# Altium PCB Program_Counter.PcbDoc
Units mil, origin at the board's own origin, x right, y up, seen from the top; angles counter-clockwise.
Board outline 5200 x 2700 mil, 2 copper layers (Top Layer, Bottom Layer); 31 components, 53 nets, 225 pads, 176 vias.
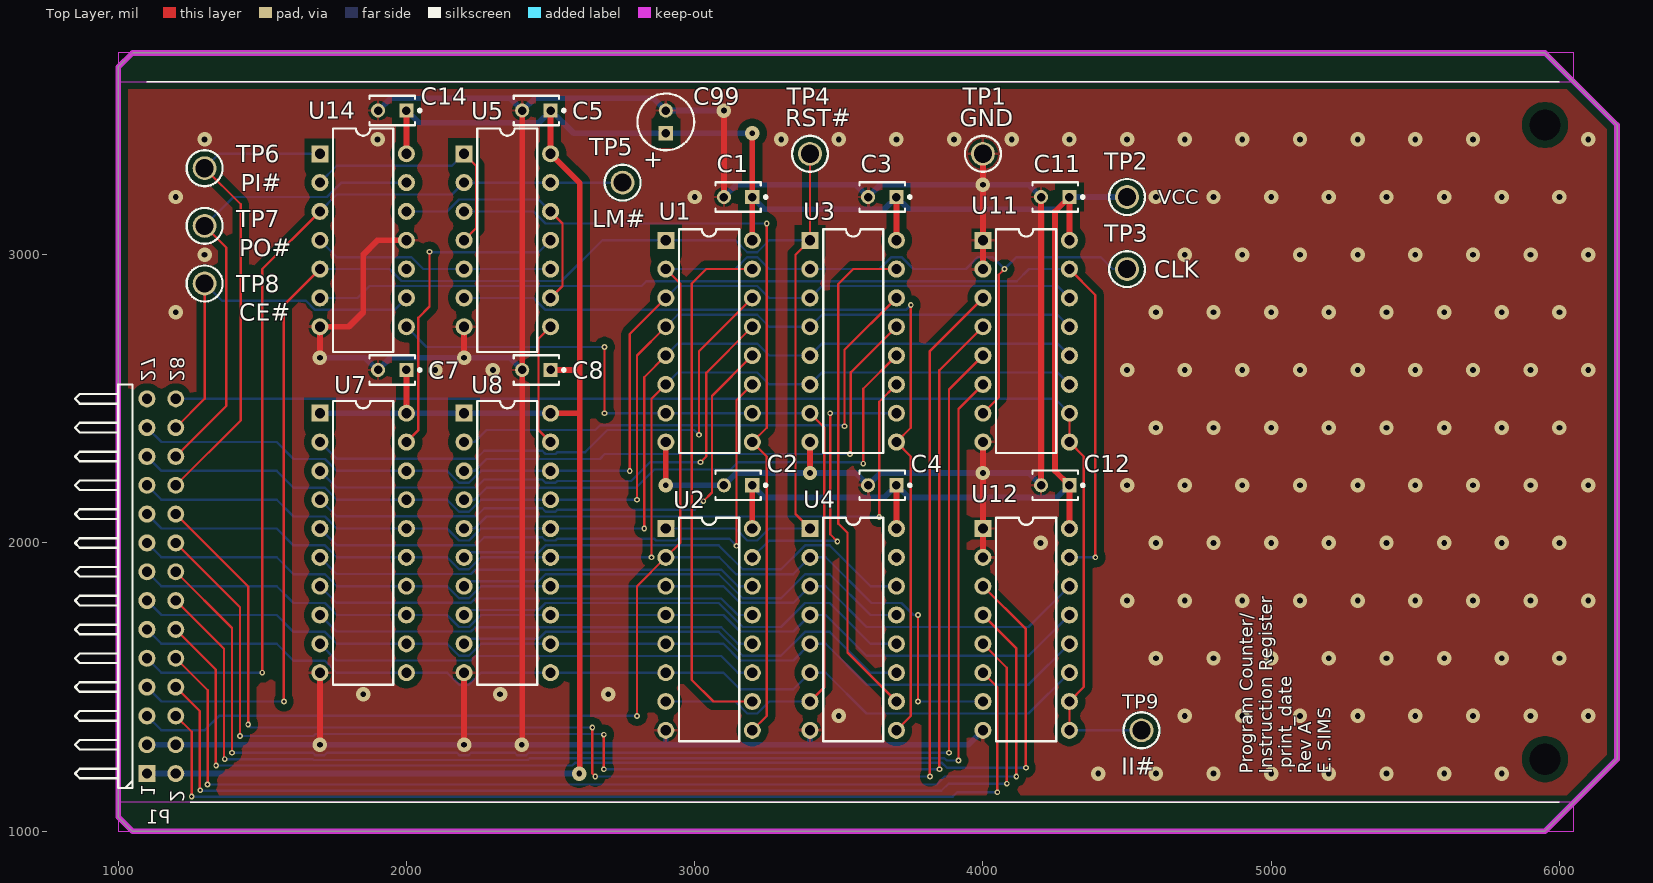
[diagram p0: Top Layer view]
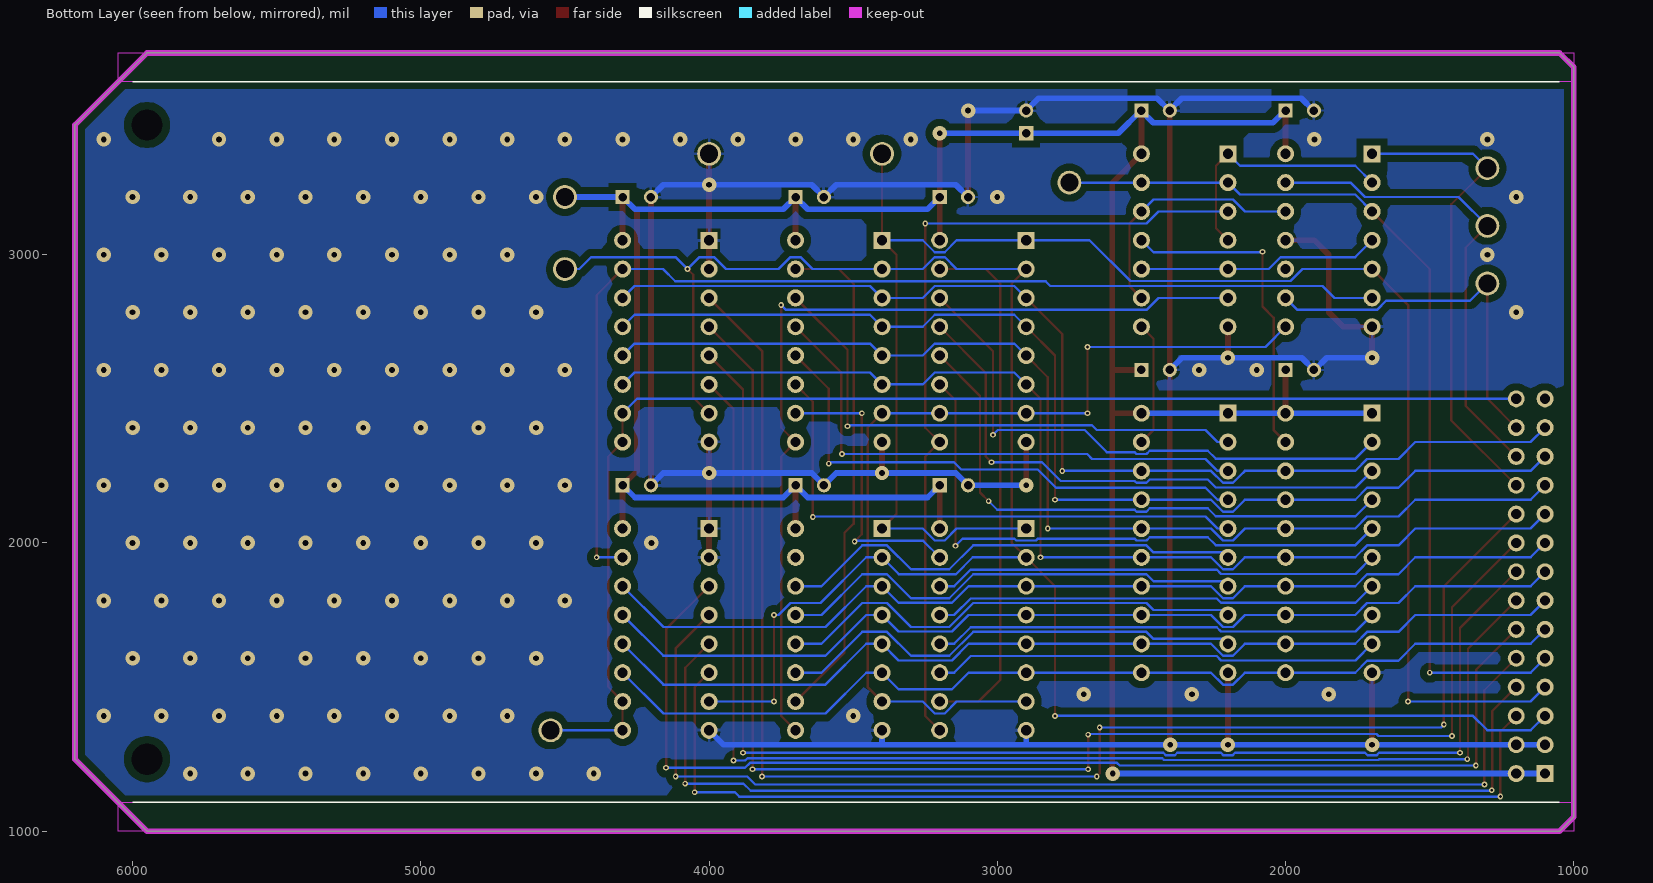
[diagram p1: Bottom Layer view, seen from below]

## Layer stack, top to bottom
Top Solder: solder mask 0.4, Solder Resist, Dk 3.5
Top Layer: signal copper 1.4
Dielectric 1: dielectric 12.6, FR-4, Dk 4.8
Bottom Layer: signal copper 1.4
Bottom Solder: solder mask 0.4, Solder Resist, Dk 3.5

## Board outline
1000,1050 1050,1000 5950,1000 6200,1250 6200,3450 5950,3700 1050,3700 1000,3650

## Design rules (kind name [scope] priority, off if disabled: settings)
BoardOutlineClearance [All] p1: gap=10 ignorepadtopadclearanceinfootprint=FALSE except(0: Arc-SplitContinuation Track-SplitContinuation SMDPad-SplitContinuation THPad-SplitContinuation Via-SplitContinuation Fill-SplitContinuation Poly-SplitContinuation Region-SplitContinuation Text-SplitContinuation)
Clearance Clearance_poly [InPoly] p1: gap=25 ignorepadtopadclearanceinfootprint=FALSE
Clearance [All] p2: gap=8 ignorepadtopadclearanceinfootprint=FALSE
HoleSize [All] p1: absolutevalues=TRUE maxlimit=120 minlimit=1 maxpercent=80.000 minpercent=20.000
PolygonConnect [All] p1: thpad.connectstyle=Relief thpad.reliefconductorwidth=10 thpad.reliefentries=4 thpad.polygonreliefangle="90 Angle" thpad.airgapwidth=10 smdpad.connectstyle=Relief smdpad.reliefconductorwidth=10 smdpad.reliefentries=4 smdpad.polygonreliefangle="90 Angle" smdpad.airgapwidth=10 via.connectstyle=Direct via.reliefconductorwidth=10 via.reliefentries=4 via.polygonreliefangle="90 Angle" via.airgapwidth=10
RoutingTopology [All] p1: topology=Daisy_Simple
RoutingVias "Schematic Routing Via Style_1" [InNetClass('PWR')] p1: holewidth=20 width=35 viastyle="Through Hole" minholewidth=20 minwidth=35 maxholewidth=20 maxwidth=50
RoutingVias [All] p2: holewidth=10 width=20 viastyle="Through Hole" minholewidth=10 minwidth=20 maxholewidth=10 maxwidth=20
SilkToSilkClearance [All] p1: silktosilkclearance=5
SilkToSolderMaskClearance [IsPad] p1: minsilkscreentomaskgap=8 clearancetoexposedcopper=TRUE
SolderMaskExpansion [All] p1: expansion=4 istentingtop=FALSE
UnRoutedNet [All] p1: checkbadconnections=TRUE
Width "Schematic Width Constraint_1" [InNetClass('PWR')] p1: maxlimit=50 minlimit=20 preferedwidth=20
Width [All] p2: maxlimit=8 minlimit=8 preferedwidth=8
25 further rules are at their usual default settings.

## Classes and differential pairs
net class PC[0..15]: PC0 PC1 PC2 PC3 PC4 PC5 PC6 PC7 PC8 PC9 PC10 PC11 PC12 PC13 PC14 PC15
net class INST[0..7]: INST0 INST1 INST2 INST3 INST4 INST5 INST6 INST7
component class PC: C1 C2 C3 C4 C5 C7 C8 U1 U2 U3 U4 U5 U7 U8 U14
component class IR: C11 C12 U11 U12
net class PWR: GND VCC
net class BUS[0..7]: BUS0 BUS1 BUS2 BUS3 BUS4 BUS5 BUS6 BUS7
component class Top: C14 C99 g P1 TP1 TP2 TP3 TP4 TP5 TP6 TP7 TP8 TP9

## Components (designator, comment, footprint, x,y, rotation, side; value= is the part's Value field where it differs from the comment)
C1 "K104K15X7RF5TL2" VISH-K104K15X7RF5TL2 3150.79,3200 r180 top locked
C2 "K104K15X7RF5TL2" VISH-K104K15X7RF5TL2 3150.79,2200 r180 top locked
C3 "K104K15X7RF5TL2" VISH-K104K15X7RF5TL2 3650.79,3200 r180 top locked
C4 "K104K15X7RF5TL2" VISH-K104K15X7RF5TL2 3650.79,2200 r180 top locked
C5 "K104K15X7RF5TL2" VISH-K104K15X7RF5TL2 2450.79,3500 r180 top locked
C7 "K104K15X7RF5TL2" VISH-K104K15X7RF5TL2 1950.79,2600 r180 top locked
C8 "K104K15X7RF5TL2" VISH-K104K15X7RF5TL2 2450.79,2600 r180 top locked
C11 "K104K15X7RF5TL2" VISH-K104K15X7RF5TL2 4250.79,3200 r180 top locked
C12 "K104K15X7RF5TL2" VISH-K104K15X7RF5TL2 4250.79,2200 r180 top locked
C14 "K104K15X7RF5TL2" VISH-K104K15X7RF5TL2 1950.79,3500 r180 top locked
C99 "Cap Pol5" C5x7 2900,3460.63 r90 top locked value=10uF
P1 "Program Counter" HDR2X14H 1100,1200 r90 top locked
TP1 "GND" KSTN-5011_V 4000,3350 r0 top locked
TP2 "VCC" KSTN-5011_V 4500,3200 r0 top locked
TP3 "CLK" KSTN-5011_V 4500,2950 r0 top locked
TP4 "RST#" KSTN-5011_V 3400,3350 r0 top locked
TP5 "LM#" KSTN-5011_V 2750,3250 r0 top locked
TP6 "PI#" KSTN-5011_V 1300,3300 r0 top locked
TP7 "PO#" KSTN-5011_V 1300,3100 r0 top locked
TP8 "CE#" KSTN-5011_V 1300,2900 r0 top locked
TP9 "II#" KSTN-5011_V 4550,1350 r0 top locked
U1 "SN74LS161AN" N016 3050,2700 r270 top locked
U2 "SN74LS161AN" N016 3050,1700 r270 top locked
U3 "SN74LS161AN" N016 3550,2700 r270 top locked
U4 "SN74LS161AN" N016 3550,1700 r270 top locked
U5 "SN74LS00N" N014 2350,3050 r270 top locked
U7 "SN74LS245N" N020 1850,2000 r270 top locked
U8 "SN74LS245N" N020 2350,2000 r270 top locked
U11 "SN74LS173AN" N016D 4150,2700 r270 top locked
U12 "SN74LS173AN" N016D 4150,1700 r270 top locked
U14 "SN74LS04N" N014 1850,3050 r270 top locked

## Footprints (in the part's own frame and the unit in brackets; to place one, negate y for a bottom-side part, rotate by r counter-clockwise, add the part's x,y. Pads: shape width x height; smd on the part's side, far side on the other; paste and mask are expansions set on the pad)
C5x7 [mm] "Capacitor; 2 Leads"
  rect 1.25x1.25 hole 0.75: 1(-1,0)
  round 1.25 hole 0.75: 2(1,0)
  silkscreen extent -2.5,-2.5 2.5,2.5, body extent -2.5,-2.5 2.5,2.5, height 7
HDR2X14H [mm] "Connector; Header; 14x2 Position; Right Angle"
  rect 1.5x1.5 hole 0.9: 1(0,0)
  round 1.5 hole 0.9: 2(0,-2.54) 3(2.54,0) 4(2.54,-2.54) 5(5.08,0) 6(5.08,-2.54) 7(7.62,0) 8(7.62,-2.54) 9(10.16,0) 10(10.16,-2.54) 11(12.7,0) 12(12.7,-2.54) 13(15.24,0) 14(15.24,-2.54) 15(17.78,0) 16(17.78,-2.54) 17(20.32,0) 18(20.32,-2.54) 19(22.86,0) 20(22.86,-2.54) 21(25.4,0) 22(25.4,-2.54) 23(27.94,0) 24(27.94,-2.54) 25(30.48,0) 26(30.48,-2.54) 27(33.02,0) 28(33.02,-2.54)
  silkscreen extent -1.27,1.27 34.29,6.35
KSTN-5011_V [mm] "Test Point, Dia 3.17mm"
  round 2.1 hole 1.6: 1(0,0)
  silkscreen extent -1.59,-1.58 1.59,1.58, body extent -1.59,-1.59 1.59,1.59, height 8.13
N014 [mm] "DIP; 14 Leads; Row Spacing 7.62 mm; Pitch 2.54 mm"
  rect 1.5x1.5 hole 0.9: 1(-7.62,-3.81)
  round 1.5 hole 0.9: 2(-5.08,-3.81) 3(-2.54,-3.81) 4(0,-3.81) 5(2.54,-3.81) 6(5.08,-3.81) 7(7.62,-3.81) 8(7.62,3.81) 9(5.08,3.81) 10(2.54,3.81) 11(0,3.81) 12(-2.54,3.81) 13(-5.08,3.81) 14(-7.62,3.81)
  silkscreen extent -9.85,-2.65 9.85,2.65, body extent -9.15,-5.08 9.15,5.12, height 7.88
N016 [mm] "DIP; 16 Leads; Row Spacing 7.62 mm; Pitch 2.54 mm"
  rect 1.5x1.5 hole 0.9: 1(-8.89,-3.81)
  round 1.5 hole 0.9: 2(-6.35,-3.81) 3(-3.81,-3.81) 4(-1.27,-3.81) 5(1.27,-3.81) 6(3.81,-3.81) 7(6.35,-3.81) 8(8.89,-3.81) 9(8.89,3.81) 10(6.35,3.81) 11(3.81,3.81) 12(1.27,3.81) 13(-1.27,3.81) 14(-3.81,3.81) 15(-6.35,3.81) 16(-8.89,3.81)
  silkscreen extent -9.85,-2.65 9.85,2.65, body extent -10.46,-5.08 10.46,5.12, height 7.88
N016D [mm] "DIP; 16 Leads; Row Spacing 7.62 mm; Pitch 2.54 mm"
  rect 1.5x1.5 hole 0.9: 1(-8.89,-3.81)
  round 1.5 hole 0.9: 2(-6.35,-3.81) 3(-3.81,-3.81) 4(-1.27,-3.81) 5(1.27,-3.81) 6(3.81,-3.81) 7(6.35,-3.81) 8(8.89,-3.81) 9(8.89,3.81) 10(6.35,3.81) 11(3.81,3.81) 12(1.27,3.81) 13(-1.27,3.81) 14(-3.81,3.81) 15(-6.35,3.81) 16(-8.89,3.81)
  silkscreen extent -9.85,-2.65 9.85,2.65, body extent -10.46,-5.08 10.46,5.12, height 7.88
N020 [mm] "DIP; 20 Leads; Row Spacing 7.62 mm; Pitch 2.54 mm"
  rect 1.5x1.5 hole 0.9: 1(-11.43,-3.81)
  round 1.5 hole 0.9: 2(-8.89,-3.81) 3(-6.35,-3.81) 4(-3.81,-3.81) 5(-1.27,-3.81) 6(1.27,-3.81) 7(3.81,-3.81) 8(6.35,-3.81) 9(8.89,-3.81) 10(11.43,-3.81) 11(11.43,3.81) 12(8.89,3.81) 13(6.35,3.81) 14(3.81,3.81) 15(1.27,3.81) 16(-1.27,3.81) 17(-3.81,3.81) 18(-6.35,3.81) 19(-8.89,3.81) 20(-11.43,3.81)
  silkscreen extent -12.5,-2.65 12.5,2.65, body extent -13.08,-5.08 13.08,5.12, height 7.88
VISH-K104K15X7RF5TL2 [mm] "THD, 2-Leads, Body 4x2.6mm"
  rect 1.25x1.25 hole 0.75: 1(-1.25,0)
  round 1.25 hole 0.75: 2(1.25,0)
  silkscreen extent -2.55,-1.3 2,1.3, body extent -2,-1.3 2,1.3, height 5.6

## Part data
C1 C2 C3 C4 C5 C7 C8 C11 C12 C14: library part CMP-2000-06508-1, "Ceramic Capacitor, 100 nF, +/- 10%, 50 V, -55 to 125 degC, 2-Pin THD, RoHS, Tape and Reel", Capacitance=0.1µF, Manufacturer=Vishay, Operating Temperature=-55°C~125°C, Package / Case=Radial, Package Description="2-Pin Through Hole Device, Body 4 x 2.6 mm", Ratings=-, Standard Package=1, Temperature Coefficient=X7R, Tolerance=±10%, Voltage - Rated=50V, Applications=GeneralPurpose, Catalog Drawings=Mono-KapSide2-15_5.58Mono-KapSide1_15, Category=Capacitors, Datasheet URL=http://www.vishay.com/docs/45171/kseries.pdf, Datasheet Version=08/2013, Family=CeramicCapacitors, Features=-, Height - Seated (Max)="0.220\"(5.58mm)", Lead Spacing="0.098\"(2.50mm)", Lead Style=Straight, Manufacturer URL=http://www.vishay.com/, Mounting Technology=ThroughHole, Mounting Type=ThroughHole, Online Catalog=Mono-Kap™Series, Other Names=BC1084CT, Package Reference=K104K15X7RF5TL2, Packaging=CutTape(CT), Series=Mono-Kap™K, Size / Dimension="0.157\"Lx0.098\"W(4.00mmx2.50mm)", Thickness (Max)=-
C99: "Polarized Capacitor", LatestRevisionDate=17-Jul-2002, LatestRevisionNote="Re-released for DXP Platform.", PackageDescription="Polarized Capacitor; 2 Leads", PackageReference=POLAR0.8, Published=8-Jun-2000, Publisher="Altium Limited"
P1: library part "Header 14X2H", "Header, 14-Pin, Dual row, Right Angle", LatestRevisionDate=17-Jul-2002, LatestRevisionNote="Re-released for DXP Platform.", Publisher="Altium Limited", System=Connector
TP1 TP2 TP3 TP4 TP5 TP6 TP7 TP8 TP9: library part TP
U1 U2 U3 U4: "Synchronous 4-Bit Counter", Code_JEDEC=MS-001-BB, ComponentLink1Description="Manufacturer Link", ComponentLink1URL=http://www.ti.com/, ComponentLink2Description=Datasheet, ComponentLink2URL=http://www-s.ti.com/sc/ds/sn74ls161a.pdf, ComponentLink3Description="URL Link1", ComponentLink3URL=http://focus.ti.com/docs/prod/folders/print/sn74ls161a.html, DatasheetVersion=Mar-1988, LatestRevisionDate=04-Mar-2005, LatestRevisionNote="Stylized 3D Model Added.", PackageDescription="DIP; 16 Leads; Row Spacing 7.62 mm; Pitch 2.54 mm", PackageReference=N016, PackageVersion=Oct-1995, Published=8-Jun-2000, Publisher="Altium Limited"
U5: "Quadruple 2-Input Positive-NAND Gate", ComponentLink1Description="Manufacturer Link", ComponentLink1URL=http://www.ti.com/, ComponentLink2Description=Datasheet, ComponentLink2URL=http://www-s.ti.com/sc/ds/sn74ls00.pdf, DatasheetVersion=Mar-1988, LatestRevisionDate=04-Mar-2005, LatestRevisionNote="Stylized 3D Model Added.", PackageDescription="DIP; 14 Leads; Row Spacing 7.62 mm; Pitch 2.54 mm", PackageReference=N014, PackageVersion=Oct-1995, Published=8-Jun-2000, Publisher="Altium Limited"
U7 U8: "Octal Bus Transceiver with 3-State Outputs", ComponentLink1Description="Manufacturer Link", ComponentLink1URL=http://www.ti.com/, ComponentLink2Description=Datasheet, ComponentLink2URL=http://www-s.ti.com/sc/ds/sn74ls245.pdf, DatasheetVersion=Mar-1988, LatestRevisionDate=04-Mar-2005, LatestRevisionNote="Stylized 3D Model Added.", PackageDescription="DIP; 20 Leads; Row Spacing 7.62 mm; Pitch 2.54 mm", PackageReference=N020, PackageVersion=Oct-1995, Published=8-Jun-2000, Publisher="Altium Limited"
U11 U12: "4-Bit D-Type Register with 3-State Outputs", Code_JEDEC=MS-001-BB, ComponentLink1Description="Manufacturer Link", ComponentLink1URL=http://www.ti.com/, ComponentLink2Description=Datasheet, ComponentLink2URL=http://www-s.ti.com/sc/ds/sn74ls173a.pdf, DatasheetVersion=Mar-1988, LatestRevisionDate=04-Mar-2005, LatestRevisionNote="Stylized 3D Model Added.", PackageDescription="DIP; 16 Leads; Row Spacing 7.62 mm; Pitch 2.54 mm", PackageReference=N016D, PackageVersion=Oct-1995, Published=8-Jun-2000, Publisher="Altium Limited"
U14: "Hex Inverter", ComponentLink1Description="Manufacturer Link", ComponentLink1URL=http://www.ti.com/, ComponentLink2Description=Datasheet, ComponentLink2URL=http://www-s.ti.com/sc/ds/sn74ls04.pdf, DatasheetVersion=Mar-1988, LatestRevisionDate=04-Mar-2005, LatestRevisionNote="Stylized 3D Model Added.", PackageDescription="DIP; 14 Leads; Row Spacing 7.62 mm; Pitch 2.54 mm", PackageReference=N014, PackageVersion=Oct-1995, Published=8-Jun-2000, Publisher="Altium Limited"

## Free pads (board coordinates)
  round 0 hole 109: ""(5950,1250) ""(5950,3450)

## Via types
v1: diameter 50, hole 20, Top Layer to Bottom Layer, tented both sides, 130 vias
v2: diameter 20, hole 10, Top Layer to Bottom Layer, tented both sides, 46 vias

## Nets (pads, with @x,y where several pads share a name; then routed paths per layer and width w, separated by ;. In a path a pad name is that pad's centre, name@x,y a point inside that pad or via, vN(x,y) a via of type N, cw(c..) or ccw(c..) an arc to the next point about the centre after c; other vN are vias at no path point)
BUS0: P1.25 U1.3 U3.3 U7.18 U8.18 U11.14 | length 3892.1
  Top Layer w8: v2(2775,2250) 2775,2725 U1.3
  Bottom Layer w8: P1.25 1150,2350 1550,2350 1608.47,2291.53 1717.2,2291.53 1758.73,2250 U7.18 2141.27,2250 2158.47,2232.8 2182.8,2208.47 2217.2,2208.47 2258.73,2250 U8.18 v2(2775,2250) ; U1.3 2941.53,2891.53 3182.8,2891.53 3217.2,2891.53 3258.73,2850 U3.3 3441.53,2891.53 3682.8,2891.53 4258.47,2891.53 U11.14
BUS1: P1.23 U1.4 U3.4 U7.17 U8.17 U11.13 | length 3906.8
  Top Layer w8: v2(2800,2150) 2800,2650 U1.4
  Bottom Layer w8: P1.23 1150,2250 1550,2250 1608.47,2191.53 1717.2,2191.53 1758.73,2150 U7.17 2141.27,2150 2158.47,2132.8 2182.8,2108.47 2217.2,2108.47 2258.73,2150 U8.17 v2(2800,2150) ; U1.4 2941.53,2791.53 3182.8,2791.53 3217.2,2791.53 3258.73,2750 U3.4 3441.53,2791.53 3682.8,2791.53 4258.47,2791.53 U11.13
BUS2: P1.21 U1.5 U3.5 U7.16 U8.16 U11.12 | length 3921.4
  Top Layer w8: v2(2825,2050) 2825,2575 U1.5
  Bottom Layer w8: P1.21 1150,2150 1550,2150 1608.47,2091.53 1717.2,2091.53 1758.73,2050 U7.16 2141.27,2050 2158.47,2032.8 2182.8,2008.47 2217.2,2008.47 2258.73,2050 U8.16 v2(2825,2050) ; U1.5 2941.53,2691.53 3182.8,2691.53 3217.2,2691.53 3258.73,2650 U3.5 3441.53,2691.53 3682.8,2691.53 4258.47,2691.53 U11.12
BUS3: P1.19 U1.6 U3.6 U7.15 U8.15 U11.11 | length 3936.1
  Top Layer w8: v2(2850,1950) 2850,2500 U1.6
  Bottom Layer w8: P1.19 1150,2050 1550,2050 1608.47,1991.53 1717.2,1991.53 1758.73,1950 U7.15 2141.27,1950 2158.47,1932.8 2182.8,1908.47 2217.2,1908.47 2258.73,1950 U8.15 v2(2850,1950) ; U1.6 2941.53,2591.53 3182.8,2591.53 3217.2,2591.53 3258.73,2550 U3.6 3441.53,2591.53 3682.8,2591.53 4258.47,2591.53 U11.11
BUS4: P1.17 U2.3 U4.3 U7.14 U8.14 U12.14 | length 3461.4
  Bottom Layer w8: P1.17 1150,1950 1550,1950 1608.47,1891.53 1717.2,1891.53 1758.73,1850 U7.14 2141.27,1850 2182.8,1808.47 2217.2,1808.47 2258.73,1850 U8.14 U2.3 3100,1850 3157.53,1792.47 3342.47,1792.47 U4.3 3455,1850 3596.53,1708.47 4158.47,1708.47 U12.14
BUS5: P1.15 U2.4 U4.4 U7.13 U8.13 U12.13 | length 3461.4
  Bottom Layer w8: P1.15 1150,1850 1550,1850 1608.47,1791.53 1717.2,1791.53 1758.73,1750 U7.13 2141.27,1750 2182.8,1708.47 2217.2,1708.47 2258.73,1750 U8.13 U2.4 3100,1750 3157.53,1692.47 3342.47,1692.47 U4.4 3455,1750 3596.53,1608.47 4158.47,1608.47 U12.13
BUS6: P1.13 U2.5 U4.5 U7.12 U8.12 U12.12 | length 3461.4
  Bottom Layer w8: P1.13 1150,1750 1550,1750 1608.47,1691.53 1717.2,1691.53 1758.73,1650 U7.12 2141.27,1650 2182.8,1608.47 2217.2,1608.47 2258.73,1650 U8.12 U2.5 3100,1650 3157.53,1592.47 3342.47,1592.47 U4.5 3455,1650 3596.53,1508.47 4158.47,1508.47 U12.12
BUS7: P1.11 U2.6 U4.6 U7.11 U8.11 U12.11 | length 3461.4
  Bottom Layer w8: P1.11 1150,1650 1550,1650 1608.47,1591.53 1717.2,1591.53 1758.73,1550 U7.11 2141.27,1550 2182.8,1508.47 2217.2,1508.47 2258.73,1550 U8.11 U2.6 3100,1550 3157.53,1492.47 3342.47,1492.47 U4.6 3455,1550 3596.53,1408.47 4158.47,1408.47 U12.11
CE: U1.7 U1.10 U2.7 U3.7 U4.7 U14.8 | length 3234.8
  Top Layer w8: v2(2687.5,2450) v2(2687.5,2680) ; U4.7 3450,1500 3450,2400 U3.7
  Bottom Layer w8: U14.8 2070,2680 v2(2687.5,2680) ; v2(2687.5,2450) U1.7 U1.10 U3.7 ; U2.7 3141.27,1450 3182.8,1408.47 3217.2,1408.47 3258.73,1450 U4.7
CE#: P1.26 TP8.1 U14.9 | length 1296.5
  Top Layer w8: P1.26 1300,2500 TP8.1
  Bottom Layer w8: TP8.1 1360,2840 1651.27,2840 1682.8,2808.47 1958.47,2808.47 U14.9
CLK: P1.5 TP3.1 U1.2 U2.2 U3.2 U4.2 U11.7 U12.7 | length 7174.2
  Top Layer w8: v2(2800,1400) 2800,1850 U2.2 2950,2000 2950,2900 U1.2 ; v2(3775,1450) v2(3775,1750) ; U11.7 4055,2505 4055,2930 v2(4075,2950)
  Bottom Layer w8: P1.5 1150,1350 1300,1350 1350,1400 v2(2800,1400) ; U2.2 3085,1950 3143.47,1891.53 3341.53,1891.53 U4.2 3455,1950 3613.47,1791.53 3717.2,1791.53 3758.73,1750 v2(3775,1750) ; U1.2 3141.27,2950 3182.8,2991.53 3217.2,2991.53 3258.73,2950 U3.2 3641.27,2950 3682.8,2991.53 3717.2,2991.53 3758.73,2950 3941.27,2950 3982.8,2991.53 4033.47,2991.53 v2(4075,2950) 4116.53,2991.53 4408.47,2991.53 4450,2950 TP3.1 ; v2(3775,1450) U12.7
GND: C1.2 C2.2 C3.2 C4.2 C5.2 C7.2 C8.2 C11.2 C12.2 C14.2 C99.2 P1.3 P1.4 TP1.1 U1.8 U2.8 U3.8 U4.8 U5.7 U7.10 U8.10 U11.1 U11.2 U11.8 U12.1 U12.2 U12.8 U14.7 U14.11 | length 13399.7
  Top Layer w20: v1(1700,1300) U7.10 ; v1(1700,2642.61) U14.7 1800,2750 1850,2800 1850,3000 1900,3050 U14.11 ; v1(2200,1300) U8.10 ; v1(2200,2642.61) U5.7 ; v1(2400,1300) 2401.57,1301.57 C8.2 C5.2 ; v1(2900,2200) U1.8 ; C1.2 v1(3101.57,3500) ; v1(3400,2242.61) U3.8 ; U12.2 U12.1 v1(4000,2242.61) U11.8 ; U11.2 U11.1 v1(4000,3242.61) TP1.1 ; C12.2 C11.2
  Bottom Layer w20: P1.3 P1.4 v1(1700,1300) v1(2200,1300) v1(2400,1300) 2900,1300 ; v1(1700,2642.61) 1857.39,2642.61 C7.2@1900,2600 ; C7.2 1944.18,2642.61 v1(2200,2642.61) 2358.97,2642.61 C8.2 ; C14.2@1903.15,3500 1945.76,3542.61 2360.54,3542.61 2403.15,3500 2445.76,3542.61 2857.39,3542.61 C99.2 v1(3101.57,3500) ; U2.8 2900,1300 ; v1(2900,2200) C2.2 3144.18,2242.61 3558.97,2242.61 C4.2 3644.18,2242.61 4158.97,2242.61 C12.2 ; C1.2 3144.18,3242.61 3558.97,3242.61 C3.2 3644.18,3242.61 v1(4000,3242.61) 4158.97,3242.61 C11.2 ; U4.8 3400,1300 ; U12.8 3950,1300 3400,1300 ; 2900,1300 3400,1300
  other v1: 4400,1200 4600,1200 4800,1200 5000,1200 5200,1200 5400,1200 5600,1200 5800,1200 3500,1400 4700,1400 4900,1400 5100,1400 5300,1400 5500,1400 5700,1400 5900,1400 6100,1400 1850,1475 2325,1475 2700,1475 4600,1600 4800,1600 5000,1600 5200,1600 5400,1600 5600,1600 5800,1600 6000,1600 4500,1800 4700,1800 4900,1800 5100,1800 5300,1800 5500,1800 5700,1800 5900,1800 6100,1800 4200,2000 4600,2000 4800,2000 5000,2000 5200,2000 5400,2000 5600,2000 5800,2000 6000,2000 4500,2200 4700,2200 4900,2200 5100,2200 5300,2200 5500,2200 5700,2200 5900,2200 6100,2200 4600,2400 4800,2400 5000,2400 5200,2400 5400,2400 5600,2400 5800,2400 6000,2400 2100,2600 2300,2600 4500,2600 4700,2600 4900,2600 5100,2600 5300,2600 5500,2600 5700,2600 5900,2600 6100,2600 1200,2800 4600,2800 4800,2800 5000,2800 5200,2800 5400,2800 5600,2800 5800,2800 6000,2800 1300,3000 4700,3000 4900,3000 5100,3000 5300,3000 5500,3000 5700,3000 5900,3000 6100,3000 1200,3200 3000,3200 4600,3200 4800,3200 5000,3200 5200,3200 5400,3200 5600,3200 5800,3200 6000,3200 1300,3400 1900,3400 3300,3400 3500,3400 3700,3400 3900,3400 4100,3400 4300,3400 4500,3400 4700,3400 4900,3400 5100,3400 5300,3400 5500,3400 5700,3400 6100,3400
II#: P1.28 TP9.1 U11.9 U11.10 U12.9 U12.10 | length 4512.1
  Top Layer w8: U12.9 U12.10 4350,1500 4350,2300 U11.9 U11.10
  Bottom Layer w8: P1.28 4250,2500 U11.10 ; U12.9 TP9.1
INST0: P1.20 U11.3 | length 5103.5
  Top Layer w8: P1.20 1451,1849 v2(1451,1370) ; v2(2645,1360) 2645,1200 v2(2655,1190) ; v2(3816,1190) 3816,2666 U11.3
  Bottom Layer w8: v2(1451,1370) 1461,1360 v2(2645,1360) ; v2(2655,1190) v2(3816,1190)
INST1: P1.18 U11.4 | length 4909.6
  Top Layer w8: P1.18 1423,1777 v2(1423,1330) ; v2(2685,1215) v2(2685,1335) ; v2(3849,1215) 3849,2599 U11.4
  Bottom Layer w8: v2(1423,1330) 1677.67,1330 1684.67,1337 2683,1337 v2(2685,1335) ; v2(2685,1215) v2(3849,1215)
INST2: P1.16 U11.5 | length 4645
  Top Layer w8: P1.16 1395,1705 v2(1395,1272) ; v2(3882,1272) 3882,2532 U11.5
  Bottom Layer w8: v2(1395,1272) 1675.67,1272 1684.67,1263 1715.33,1263 1724.33,1272 2175.67,1272 2184.67,1263 2215.33,1263 2224.33,1272 2375.67,1272 2384.67,1263 2415.33,1263 2424.33,1272 v2(3882,1272)
INST3: P1.14 U11.6 | length 4522.7
  Top Layer w8: P1.14 1367,1633 1367,1248 1370,1245 v2(1370,1250) ; v2(3915,1245) 3915,2465 U11.6
  Bottom Layer w8: v2(1370,1250) 1675.05,1250 1678.05,1247 2421.95,1247 2427.95,1253 3867,1253 3875,1245 v2(3915,1245)
INST4: P1.12 U12.3 | length 4047.5
  Top Layer w8: P1.12 1339,1561 1339,1226 1340,1225 v2(1340,1228) ; U12.3 4149,1701 v2(4149,1220)
  Bottom Layer w8: v2(1340,1228) 2575.67,1228 2584.67,1237 3858.11,1237 3875.11,1220 v2(4149,1220)
INST5: P1.10 U12.4 | length 3914
  Top Layer w8: P1.10 1311,1489 1311,1161 1310,1160 v2(1310,1162) ; U12.4 4116,1634 v2(4116,1190)
  Bottom Layer w8: v2(1310,1162) 3839.56,1162 3867.56,1190 v2(4116,1190)
INST6: P1.8 U12.5 | length 3725.8
  Top Layer w8: P1.8 1283,1417 1283,1142 1285,1140 v2(1285,1142) ; U12.5 4083,1567 v2(4083,1165)
  Bottom Layer w8: v2(1285,1142) 1287,1140 3855.31,1140 3880.31,1165 v2(4083,1165)
INST7: P1.6 U12.6 | length 3539.7
  Top Layer w8: P1.6 1255,1345 v2(1255,1120) ; U12.6 4050,1500 v2(4050,1135)
  Bottom Layer w8: v2(1255,1120) 3895,1120 3910,1135 v2(4050,1135)
L\O\A\D\_\L\S\B\: U1.9 U2.9 U5.3 | length 2889.3
  Top Layer w8: U2.9 3250,1400 3250,2300 U1.9 3250,2400 v2(3250,3108.47) v2@3250,3110
  Bottom Layer w8: U5.3 2441.27,3150 2482.8,3108.47 v2(3250,3108.47)
L\O\A\D\_\M\S\B\: U3.9 U4.9 U5.6 | length 3111.2
  Top Layer w8: U4.9 3750,1400 3750,2300 U3.9 3750,2400 v2(3750,2825)
  Bottom Layer w8: U5.6 2441.27,2850 2482.8,2808.47 3733.47,2808.47 v2(3750,2825)
LM: U5.5 U5.10 U14.4 | length 841.4
  Bottom Layer w8: U14.4 1758.47,2991.53 2017.2,2991.53 2058.73,2950 U5.5 U5.10
LM#: P1.9 TP5.1 U5.2 U5.13 U14.3 | length 3195
  Top Layer w8: v2(1500,1550) 1500,2950 U14.3
  Bottom Layer w8: P1.9 1150,1550 v2(1500,1550) ; U14.3 1758.47,3208.47 2158.47,3208.47 U5.2 U5.13 TP5.1
LOAD: U5.1 U5.4 U14.2 | length 875.8
  Top Layer w8: U5.4 2241.53,3091.53 2241.53,3308.47 U5.1
  Bottom Layer w8: U14.2 1758.47,3308.47 2158.47,3308.47 U5.1
NetU1_15: U1.15 U2.10 | length 1846.8
  Top Layer w8: U2.10 3065,1450 2990,1525 2990,2900 3040,2950 U1.15
NetU2_15: U2.15 U3.10 | length 1005.2
  Top Layer w8: v2(3470,2450) 3470,2030 v2(3495,2005)
  Bottom Layer w8: U2.15 3257.53,2007.53 3492.47,2007.53 v2(3495,2005) ; v2(3470,2450) U3.10
NetU3_15: U3.15 U4.10 | length 1755.2
  Top Layer w8: U4.10 3530,1620 3530,2035 3498,2067 3498,2898 3550,2950 U3.15
O\U\T\_\L\S\B\: U5.11 U7.19 | length 1131
  Top Layer w8: U7.19 2041.53,2391.53 2041.53,2781.53 2080,2820 v2(2080,3010)
  Bottom Layer w8: v2(2080,3010) 2081.53,3008.47 2458.47,3008.47 U5.11
O\U\T\_\M\S\B\: U5.8 U8.19 | length 434.4
  Top Layer w8: U8.19 2458.47,2391.53 2458.47,2708.47 U5.8
OUT: U5.9 U5.12 U14.12 | length 868.8
  Top Layer w8: U5.9 2541.53,2891.53 2541.53,3108.47 U5.12
  Bottom Layer w8: U14.12 2141.27,3150 2182.8,3191.53 2458.47,3191.53 U5.12
PC0: U1.14 U7.2 | length 1947.9
  Top Layer w8: v2(3015,2375) 3015,2665 U1.14
  Bottom Layer w8: U7.2 1757.53,2292.47 2242.47,2292.47 2270,2320 2471.27,2320 2482.8,2308.47 2517.2,2308.47 2523.73,2315 2620,2315 2696.53,2391.53 2998.47,2391.53 v2(3015,2375)
PC1: U1.13 U7.3 | length 1934.2
  Top Layer w8: v2(3020,2280) 3040,2300 3040,2590 U1.13
  Bottom Layer w8: U7.3 1757.53,2192.47 2242.47,2192.47 2270,2220 2471.27,2220 2482.8,2208.47 2517.2,2208.47 2523.73,2215 2780,2215 2845,2280 v2(3020,2280)
PC2: U1.12 U7.4 | length 1960.6
  Top Layer w8: v2(3030,2145) 3060,2175 3060,2510 U1.12
  Bottom Layer w8: U7.4 1757.53,2092.47 2242.47,2092.47 2270,2120 2471.27,2120 2482.8,2108.47 2517.2,2108.47 2523.73,2115 3000,2115 v2(3030,2145)
PC3: U1.11 U7.5 | length 2086.7
  Top Layer w8: v2(3145,1990) 3145,2495 U1.11
  Bottom Layer w8: U7.5 1757.53,1992.47 2242.47,1992.47 2270,2020 2471.27,2020 2482.8,2008.47 2517.2,2008.47 2523.73,2015 2857.97,2015 2858.47,2015.5 2865.5,2008.47 2934.5,2008.47 2941.03,2015 3120,2015 v2(3145,1990)
PC4: U2.14 U7.6 | length 1553.9
  Bottom Layer w8: U7.6 1757.53,1892.47 2223.83,1892.47 2238.88,1907.53 3092.47,1907.53 3150,1850 U2.14
PC5: U2.13 U7.7 | length 1553.9
  Bottom Layer w8: U7.7 1757.53,1792.47 2223.83,1792.47 2238.88,1807.53 3092.47,1807.53 3150,1750 U2.13
PC6: U2.12 U7.8 | length 1553.9
  Bottom Layer w8: U7.8 1757.53,1692.47 2223.83,1692.47 2238.88,1707.53 3092.47,1707.53 3150,1650 U2.12
PC7: U2.11 U7.9 | length 1553.9
  Bottom Layer w8: U7.9 1757.53,1592.47 2223.83,1592.47 2238.88,1607.53 3092.47,1607.53 3150,1550 U2.11
PC8: U3.14 U8.2 | length 1865.2
  Top Layer w8: v2(3520,2405) 3520,2670 U3.14
  Bottom Layer w8: U8.2 2236.1,2350 2277.63,2391.53 2655,2391.53 2671.95,2408.47 3516.53,2408.47 v2(3520,2405)
PC9: U3.13 U8.3 | length 1871.1
  Top Layer w8: v2(3538.47,2308.47) 3542,2312 3542,2592 U3.13
  Bottom Layer w8: U8.3 2236.1,2250 2277.63,2291.53 2671.51,2291.53 2688.46,2308.47 v2(3538.47,2308.47)
PC10: U3.12 U8.4 | length 1863.2
  Top Layer w8: v2(3585,2275) 3585,2535 U3.12
  Bottom Layer w8: U8.4 2236.1,2150 2277.63,2191.53 2796.53,2191.53 2860,2255 3125.46,2255 3150.07,2279.61 3580.39,2279.61 v2(3585,2275)
PC11: U3.11 U8.5 | length 1942.7
  Top Layer w8: v2(3640,2090) 3640,2490 U3.11
  Bottom Layer w8: U8.5 2236.1,2050 2277.63,2091.53 3638.47,2091.53 v2(3640,2090)
PC12: U4.14 U8.6 | length 1644.6
  Bottom Layer w8: U8.6 2217.2,1967.2 2458.47,1967.2 2482.8,1991.53 3083.47,1991.53 3166.53,1908.47 3299.74,1908.47 3382.8,1991.53 3468.47,1991.53 3610,1850 U4.14
PC13: U4.13 U8.7 | length 1644.6
  Bottom Layer w8: U8.7 2217.2,1867.2 2458.47,1867.2 2482.8,1891.53 3083.47,1891.53 3166.53,1808.47 3299.74,1808.47 3382.8,1891.53 3468.47,1891.53 3610,1750 U4.13
PC14: U4.12 U8.8 | length 1644.6
  Bottom Layer w8: U8.8 2217.2,1767.2 2458.47,1767.2 2482.8,1791.53 3083.47,1791.53 3166.53,1708.47 3299.74,1708.47 3382.8,1791.53 3468.47,1791.53 3610,1650 U4.12
PC15: U4.11 U8.9 | length 1644.6
  Bottom Layer w8: U8.9 2217.2,1667.2 2458.47,1667.2 2482.8,1691.53 3083.47,1691.53 3166.53,1608.47 3299.74,1608.47 3382.8,1691.53 3468.47,1691.53 3610,1550 U4.11
PI#: P1.22 TP6.1 U14.1 | length 1665.7
  Top Layer w8: P1.22 1425,2425 1425,3175 TP6.1
  Bottom Layer w8: TP6.1 1350,3350 U14.1
PO#: P1.24 TP7.1 U14.13 | length 1675.7
  Top Layer w8: P1.24 1375,2475 1375,3025 TP7.1
  Bottom Layer w8: TP7.1@1290,3100 TP7.1 1400,3200 1725,3200 1775,3250 U14.13
RST: U11.15 U12.15 U14.6 | length 3768.7
  Top Layer w8: U11.15 4390,2860 v2(4390,1950)
  Bottom Layer w8: U14.6 1830,2850 1871.53,2891.53 2816.53,2891.53 2832.53,2907.53 4117.53,2907.53 4160,2950 U11.15 ; U12.15 v2(4390,1950)
RST#: P1.7 TP4.1 U1.1 U2.1 U3.1 U4.1 U14.5 | length 5733.5
  Top Layer w8: v2(1575,1450) 1575,2825 U14.5 ; U4.1 3350,2100 3350,3000 U3.1 TP4.1
  Bottom Layer w8: P1.7 1150,1450 v2(1575,1450) ; U14.5 1941.27,2950 1982.8,2908.47 2538.47,2908.47 2680,3050 U1.1 3141.27,3050 3182.8,3008.47 3217.2,3008.47 3258.73,3050 U3.1 ; U2.1 3141.27,2050 3182.8,2008.47 3217.2,2008.47 3258.73,2050 U4.1
VCC: C1.1 C2.1 C3.1 C4.1 C5.1 C7.1 C8.1 C11.1 C12.1 C14.1 C99.1 P1.1 P1.2 TP2.1 U1.16 U2.16 U3.16 U4.16 U5.14 U7.1 U7.20 U8.1 U8.20 U11.16 U12.16 U14.14 | length 11113.9
  Top Layer w20: U7.20 C7.1 ; U14.14 C14.1 ; U8.20 2601.57,2450 ; C8.1 2601.57,2600 ; C5.1 U5.14 2601.57,3248.43 2601.57,2600 ; v1@2601.57,1201.57 2601.57,2450 ; U2.16 C2.1 ; U1.16 C1.1 v1(3200,3421.26) ; U4.16 C4.1 ; U3.16 C3.1 ; U12.16 C12.1 4250,2250 4250,3150 C11.1 U11.16 ; 2601.57,2450 2601.57,2600
  Bottom Layer w20: P1.1 P1.2 v1(2600,1200) ; U7.1 U7.20 U8.1 U8.20 ; C14.1@2001.57,3500 2044.18,3457.39 2458.97,3457.39 2501.57,3500 2580.32,3421.26 C99.1 v1(3200,3421.26) ; C2.1 3242.61,2157.39 3657.39,2157.39 C4.1 3742.61,2157.39 4257.39,2157.39 C12.1 ; C1.1 3242.61,3157.39 3657.39,3157.39 C3.1 3742.61,3157.39 4257.39,3157.39 C11.1 TP2.1
pads on no net: P1.27 U4.15 U14.10

## Polygon pours and split planes (outlines as drawn)
GND on Top Layer "GND_L01_P000" (solid, remove dead copper, pour order 0): 1000,1000 1000,3700 6200,3700 6200,1000
GND on Bottom Layer "GND_L02_P001" (solid, remove dead copper, pour order 1): 1000,1000 1000,3700 6200,3700 6200,1000

## Keep-outs
Top Layer:
  rectangle: 1000,1000 6050,1100
  rectangle: 1000,3600 6050,3700
Bottom Layer:
  rectangle: 1000,1000 6050,1100
  rectangle: 1000,3600 6050,3700
Keep-Out Layer:
  the board outline again, w20

## Silkscreen, mask and mechanical layers (free items; w line width, h text height)
Top Overlay:
  lines w5: 1100,3600 6000,3600 ; 1250,1100 6000,1100
  text "Program Counter/ / Instruction Register / .print_date / Rev A / E. SIMS" at 5206.91,1200 h45 r90
Bottom Overlay:
  lines w5: 1050,1100 6000,1100 ; 1050,3600 6000,3600

## Text inside footprints (layer, text, board x,y; h text height)
C99: Top Overlay "+" at 2831.11,3362.2 h59.06 r270
P1: Top Overlay "2" at 1180,1100 h50 r270; Top Overlay "1" at 1080,1120 h50 r270; Top Overlay "27" at 1080,2560 h50 r270; Top Overlay "28" at 1180,2560 h50 r270